# EAGLE board Wiring Components (EAGLE 9.7.0)

Size 153.83 x 52.46 mm. Coordinates in mm from the lower left corner, seen from the top.
Outline: 0,0 153.83,0 153.83,52.45 0,52.45 0,0
Copper layers (1*16): Top 0.035mm / dielectric 1.5mm / Bottom 0.035mm
Design rules "default": minimum track width 6mil, minimum drill 0.35mm, track to track 6mil, track to pad 6mil, pad to pad 6mil, via to via 6mil, smd to smd 6mil, copper to edge 40mil, drill to drill 6mil, minimum pad ring 10mil, minimum via ring 8mil, stop-mask expansion 4mil, vias tented up to drill 0mil, thermal gap 10mil

## Footprints (pad centres in the part's own frame; a part is rotated, then mirrored left to right if it is on the bottom)
BATTERY-GENERIC = drill 1.118 pad 3.15 octagon: + 2.54,0; - -2.54,0
CAP-THRU-2.54MM = drill 1.016 pad 1.88: 1 -1.27,0; 2 1.27,0
PIEZO = drill 1 pad 1.6: 1 -3.5,0; 2 3.5,0
RESAD1016W63L850D250B = drill 0.83 pad 1.43: 1 -5.08,0; 2 5.08,0
1X04 = drill 1.016 long: 1 -3.81,0; 2 -1.27,0; 3 1.27,0; 4 3.81,0
DIP826W53P254L959H508Q8B = drill 0.786 pad 1.386: 1 -4.13,3.81; 2 -4.13,1.27; 3 -4.13,-1.27; 4 -4.13,-3.81; 5 4.13,-3.81; 6 4.13,-1.27; 7 4.13,1.27; 8 4.13,3.81

## Placement (x,y rotation side)
BAT1  9V  [BATTERY-GENERIC]  8.26,25.73 90 top
C1  100n  [CAP-THRU-2.54MM]  131.36,15.54 0 top
PIEZO1  PIEZO  [PIEZO]  140.25,11.73 270 top
R1  1.5k  [RESAD1016W63L850D250B]  48.81,40.95 0 top
R2  1.3k  [RESAD1016W63L850D250B]  58.97,38.41 0 top
R3  620  [RESAD1016W63L850D250B]  69.13,40.95 0 top
R4  1.1k  [RESAD1016W63L850D250B]  79.29,38.41 0 top
R5  1k  [RESAD1016W63L850D250B]  89.45,40.95 0 top
R6  910  [RESAD1016W63L850D250B]  99.61,38.41 0 top
R7  390  [RESAD1016W63L850D250B]  109.77,40.95 0 top
R9  6.2k  [RESAD1016W63L850D250B]  119.93,38.41 0 top
RA  1k  [RESAD1016W63L850D250B]  132.63,43.48 270 top
S1  PINHD-1X04_1X04M  [1X04]  41.19,26.98 0 top
S2  PINHD-1X04_1X04M  [1X04]  51.35,26.98 0 top
S3  PINHD-1X04_1X04M  [1X04]  61.51,26.98 0 top
S4  PINHD-1X04_1X04M  [1X04]  71.67,26.98 0 top
S5  PINHD-1X04_1X04M  [1X04]  81.83,26.98 0 top
S6  PINHD-1X04_1X04M  [1X04]  91.99,26.98 0 top
S7  PINHD-1X04_1X04M  [1X04]  102.15,26.98 0 top
S8  PINHD-1X04_1X04M  [1X04]  112.31,26.98 0 top
U1  LM555_DIP  [DIP826W53P254L959H508Q8B]  133.9,26.98 90 top

## Library data of the parts
BAT1 C1 PIEZO1 R1-R7 R9 RA S1-S8 = Tinkercad
U1 = Tinkercad; CATEGORY: IC_Clock-Timing; CURRENT-SUPPLY: 10mA; DESCRIPTION: IC OSC SINGLE TIMER 100KHZ 8-DIP; FREQUENCY: 100kHz; MANUFACTURER: Texas Instruments; MPN: LM555CN/NOPB; OPERATING_TEMP: 0°C to 70°C; PART_STATUS: Active; ROHS_COMPLIANT: ROHS3 Compliant; SUB-CATEGORY: Timer

## Nets
BAT1+: BAT1.+ RA.1 U1.4 U1.8
BAT1-: BAT1.- C1.1 PIEZO1.2 U1.1
S1_3: R1.1 S1.3
S2_3: R1.2 R2.1 S2.3
S3_3: R2.2 R3.1 S3.3
S4_3: R3.2 R4.1 S4.3
S5_3: R4.2 R5.1 S5.3
S6_3: R5.2 R6.1 S6.3
S7_3: R6.2 R7.1 S7.3
S8_2: C1.2 S1.2 S2.2 S3.2 S4.2 S5.2 S6.2 S7.2 S8.2 U1.2 U1.6
S8_3: R7.2 R9.1 S8.3
U1_DIS: R9.2 RA.2 U1.7
U1_OUT: PIEZO1.1 U1.3

## Tracks (layer width: path | path; a pad name or v marks a point on that pad's centre or on a via)
BAT1+  (3 unrouted)
BAT1-  (3 unrouted)
S1_3  (1 unrouted)
S2_3  (2 unrouted)
S3_3  (2 unrouted)
S4_3  (2 unrouted)
S5_3  (2 unrouted)
S6_3  (2 unrouted)
S7_3  (2 unrouted)
S8_2  (10 unrouted)
S8_3  (2 unrouted)
U1_DIS  (2 unrouted)
U1_OUT  (1 unrouted)